# Altium PCB ERT- Exciting Source.PcbDoc
Units mil, origin at the board's own origin, x right, y up, seen from the top; angles counter-clockwise.
Board outline 800 x 1400 mil, 2 copper layers (Top Layer, Bottom Layer); 11 components, 12 nets, 45 pads, 4 vias.
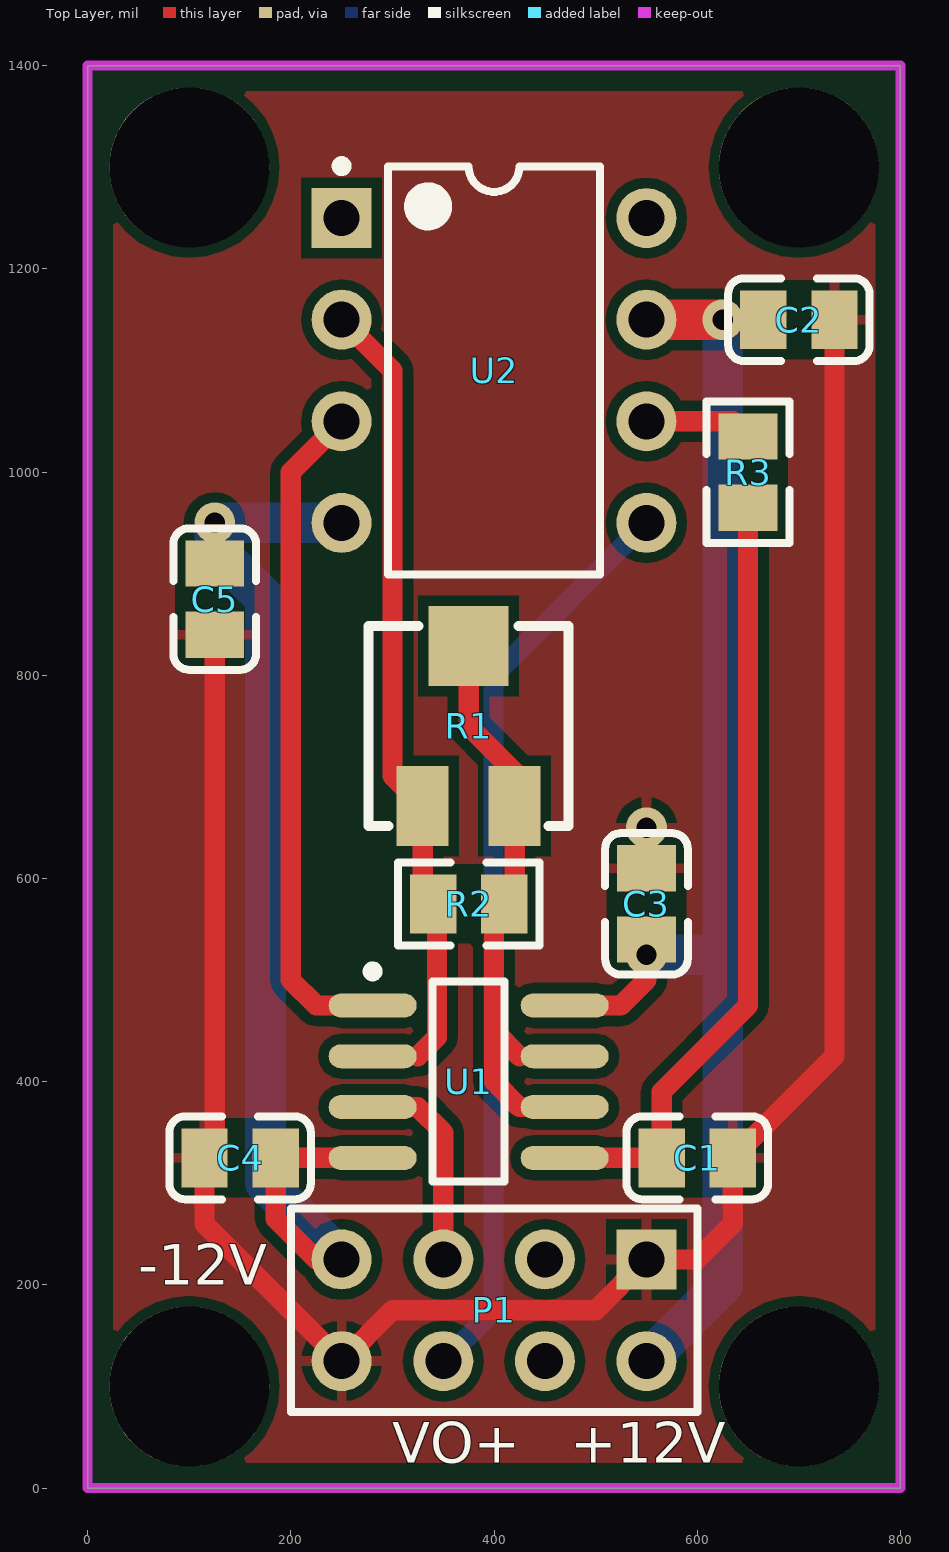
[diagram p0: Top Layer view]
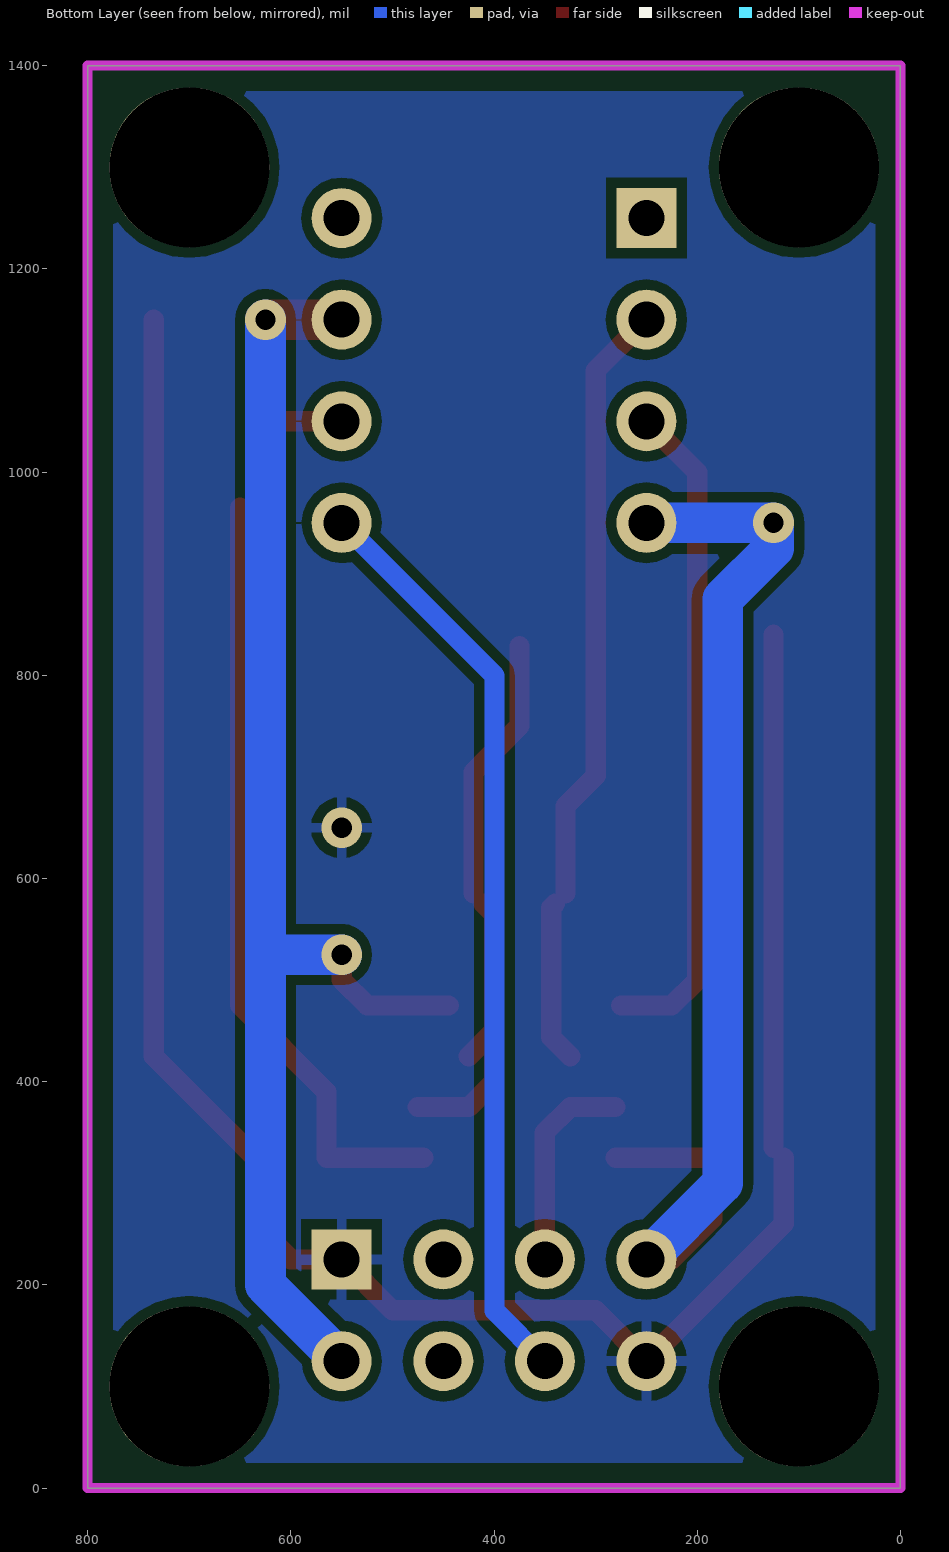
[diagram p1: Bottom Layer view, seen from below]
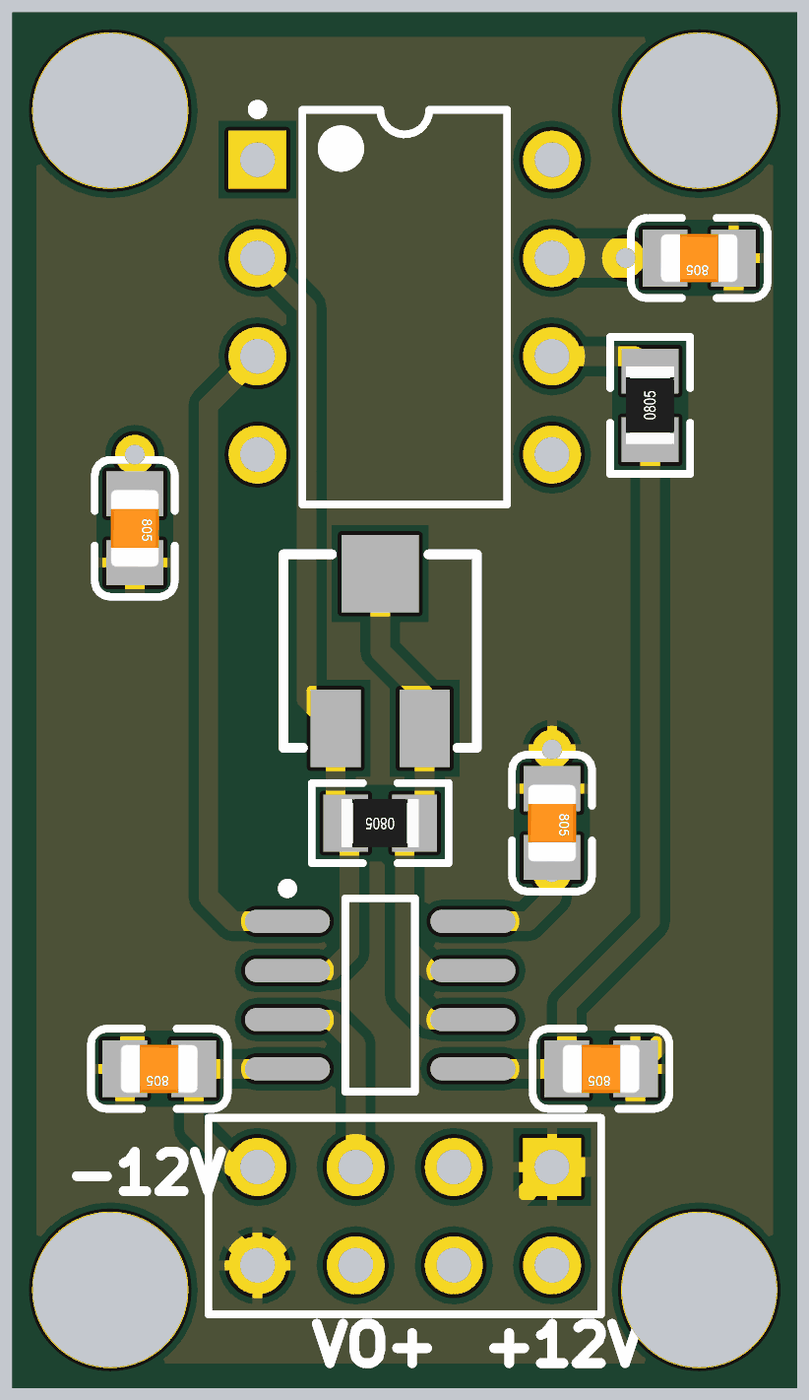
[diagram p2: 3D render of the assembled board from above, using the file's embedded part models]

## Layer stack, top to bottom
Top Solder: solder mask 0.4, Solder Resist, Dk 3.5
Top Layer: signal copper 1.4
Dielectric 1: dielectric 12.6, FR-4, Dk 4.8
Bottom Layer: signal copper 1.4
Bottom Solder: solder mask 0.4, Solder Resist, Dk 3.5

## Board outline
0,0 0,1400 800,1400 800,0

## Design rules (kind name [scope] priority, off if disabled: settings)
Clearance [All] p1: gap=10
PolygonConnect [All] p1: connectstyle=Relief reliefconductorwidth=10 reliefentries=4 polygonreliefangle="90 Angle" airgapwidth=10
RoutingVias [All] p1: holewidth=28 width=50 viastyle="Through Hole" minholewidth=28 minwidth=50 maxholewidth=28 maxwidth=50
SolderMaskExpansion [All] p1: expansion=4
Width [All] p1: maxlimit=40 minlimit=20 preferedwidth=20
29 further rules are at their usual default settings.

## Components (designator, comment, footprint, x,y, rotation, side; value= is the part's Value field where it differs from the comment)
C1 "1uF (105) 10% 50V" LC-0805_C 600,325 r180 top
C2 "100nF(104) 10% 50V" LC-0805_C 700,1150 r180 top
C3 "100nF(104) 10% 50V" LC-0805_C 550,575 r270 top
C4 "100nF(104) 10% 50V" LC-0805_C 150,325 r180 top
C5 "100nF(104) 10% 50V" LC-0805_C 125,875 r270 top
P1 "Header 4X2" HDR2X4 550,225 r180 top locked
R1 "20K" POT4MM-2 375,750 r90 top
R2 "100Ω (1000) ±1%" LC-0805_R 375,575 r180 top
R3 "100KΩ (1003) ±1%" LC-0805_R 650,1000 r90 top
U1 "AD8066AR" ADI-R-8_N 375,400 r0 top
U2 "AD844AN" ADI-N-8 400,1100 r0 top

## Footprints (in the part's own frame and the unit in brackets; to place one, negate y for a bottom-side part, rotate by r counter-clockwise, add the part's x,y. Pads: shape width x height; smd on the part's side, far side on the other; paste and mask are expansions set on the pad)
ADI-N-8 [mm] "DIP, 8-Leads, Body 9.59x6.6mm, Pitch 2.54mm"
  rect 1.5x1.5 hole 0.9: 1(-3.81,3.81)
  round 1.5 hole 0.9: 2(-3.81,1.27) 3(-3.81,-1.27) 4(-3.81,-3.81) 5(3.81,-3.81) 6(3.81,-1.27) 7(3.81,1.27) 8(3.81,3.81)
  silkscreen extent -3.93,-5.1 2.65,5.23, body extent -3.95,-5.07 3.95,5.07, height 5.33
ADI-R-8_N [mm] "SOIC, 8-Leads, Body 4.9x3.9mm, Pitch 1.27mm, IPC Medium Density"
  oval 2.2x0.6 smd: 1(-2.4,1.905) 2(-2.4,0.635) 3(-2.4,-0.635) 4(-2.4,-1.905) 5(2.4,-1.905) 6(2.4,-0.635) 7(2.4,0.635) 8(2.4,1.905)
  silkscreen extent -2.52,-2.5 0.9,2.88, body extent -2,-2.5 2,2.5, height 1.75
HDR2X4 [mm] "Connector; Header; 4x2 Position"
  rect 1.5x1.5 hole 0.9: 1(0,0)
  round 1.5 hole 0.9: 2(0,2.54) 3(2.54,0) 4(2.54,2.54) 5(5.08,0) 6(5.08,2.54) 7(7.62,0) 8(7.62,2.54)
  silkscreen extent -1.27,-1.27 8.89,3.81
LC-0805_C [mm]
  rect 1.16x1.47 smd: 1(-0.89,0) 2(0.89,0)
  silkscreen extent -1.77,-1.04 1.77,1.04, body extent -1,-0.62 1,0.63, height 0.77
LC-0805_R [mm]
  rect 1.16x1.47 smd: 1(-0.89,0) 2(0.89,0)
  silkscreen extent -1.77,-1.04 1.77,1.03, body extent -1,-0.62 1,0.63, height 0.49
POT4MM-2 [mm] "Square Trimming Potentiometer"
  rect 2x1.3 smd: CCW(-2,-1.15) CW(-2,1.15)
  rect 2x2 smd: W(2,0)
  silkscreen extent -2.5,-2.5 2.5,2.5

## Part data
C1: library part "0805 1uF (105) 10% 50V", "贴片电容"
C2 C3 C4 C5: library part "0805 100nF(104) 10% 50V", "贴片电容"
P1: "Header, 4-Pin, Dual row"
R1: library part "RPot SM", "Square Trimming Potentiometer"
R2: library part "0805 100Ω (1000) 1%", "贴片电阻"
R3: library part "0805 100KΩ (1003) 1%", "贴片电阻"
U1: "Double Channel Low Power Operational Amplifier, 145 MHz BW, 180 V/us SR, Industrial, 8-pin SOIC (R-8), Tube"
U2: "Single Channel Wide Bandwidth Operational Amplifier, 60 MHz BW, 2 KV/us SR, Industrial, 8-pin DIP (N-8), Tube"

## Free pads (board coordinates)
  round 157.48 hole 157.48: 7(100,100) 8(700,100) 9(100,1300) 10(700,1300)

## Via types
v1: diameter 40, hole 20, Top Layer to Bottom Layer, 4 vias

## Nets (pads, with @x,y where several pads share a name; then routed paths per layer and width w, separated by ;. In a path a pad name is that pad's centre, name@x,y a point inside that pad or via, vN(x,y) a via of type N, cw(c..) or ccw(c..) an arc to the next point about the centre after c; other vN are vias at no path point)
+12V: C2.2 C3.2 P1.2 U1.8 U2.7 | length 1346.9
  Top Layer w20: U1.8@444.49,475 525,475 550,500 v1(550,525)
  Top Layer w40: U2.7 v1(625,1150)
  Bottom Layer w40: P1.2 625,200 v1(625,1150) ; v1(550,525) 625,525
+VIN: P1.5 U1.3 | length 204.8
  Top Layer w20: U1.3 325,375 350,350 P1.5
-12V: C4.1 C5.1 P1.7 U1.4 U2.4 | length 1138.8
  Top Layer w20: P1.7 225,225 185.04,264.96 C4.1 U1.4
  Bottom Layer w40: P1.7 175,300 175,875 125,925 v1(125,950) U2.4
-VIN: P1.3
AGND: C1.1 C2.1 C3.1 C4.2 C5.2 P1.1 P1.8 | length 2133.2
  Top Layer w20: C4.2 114.96,260.04 P1.8 300,175 500,175 P1.1 600,225 635.04,260.04 C1.1 735.04,425 C2.1 ; C4.2@125,335.04 C5.2
  other v1: 550,650
NetC1_2: C1.2 R3.1 U1.5 | length 770.7
  Top Layer w20: U1.5 C1.2 564.96,389.96 650,475 R3.1
NetR1_CCW: R1.CCW R1.W R2.1 U1.6 U1.7 | length 562.1
  Top Layer w20: R1.W 375,750 420.28,704.72 R1.CCW R2.1@420.28,585.24 ; R2.1 400,564.96 400,450 ; 425,425 400,450 ; U1.6@475,375 425,375 400,400 400,450
NetR1_CW: R1.CW R2.2 U1.2 U2.2 | length 757.2
  Top Layer w20: U2.2 300,1100 300,700.98 R1.CW R2.2@329.72,585.24 ; 325,425 343.82,443.82 343.82,571.14 R2.2
NetR3_2: R3.2 U2.6 | length 85
  Top Layer w20: U2.6 R3.2@635.04,1050
NetU1_1: U1.1 U2.3 | length 656.1
  Top Layer w20: U2.3 200,1000 200,500 225,475 U1.1@275,475
VO+: P1.6 U2.5 | length 907.8
  Bottom Layer w20: P1.6 399.53,174.53 399.53,799.53 U2.5
VO-: P1.4
pads on no net: U2.1 U2.8

## Polygon pours and split planes (outlines as drawn)
AGND on Top Layer "Bottom Layer-No Net" (solid, remove dead copper, pour order 2): 25,1375 775,1375 775,25 25,25 25,1375
AGND on Bottom Layer "Bottom Layer-No Net" (solid, remove dead copper, pour order 4): 25,1375 775,1375 775,25 25,25 25,1375

## Keep-outs
Keep-Out Layer:
  the board outline again, w10

## Silkscreen, mask and mechanical layers (free items; w line width, h text height)
Top Overlay:
  text "-12V" at 50,200 h40
  text "VO+" at 300,25 h40
  text "+12V" at 475,25 h40